# Altium PCB Altium_2023-04-22.pcbdoc (part 1 of 3)
Units mil, origin at the board's own origin, x right, y up, seen from the top; angles counter-clockwise.
Board outline 4864.16 x 2916.69 mil, 2 copper layers (Top Layer, Bottom Layer); 24 components, 36 nets, 126 pads, 11 vias.
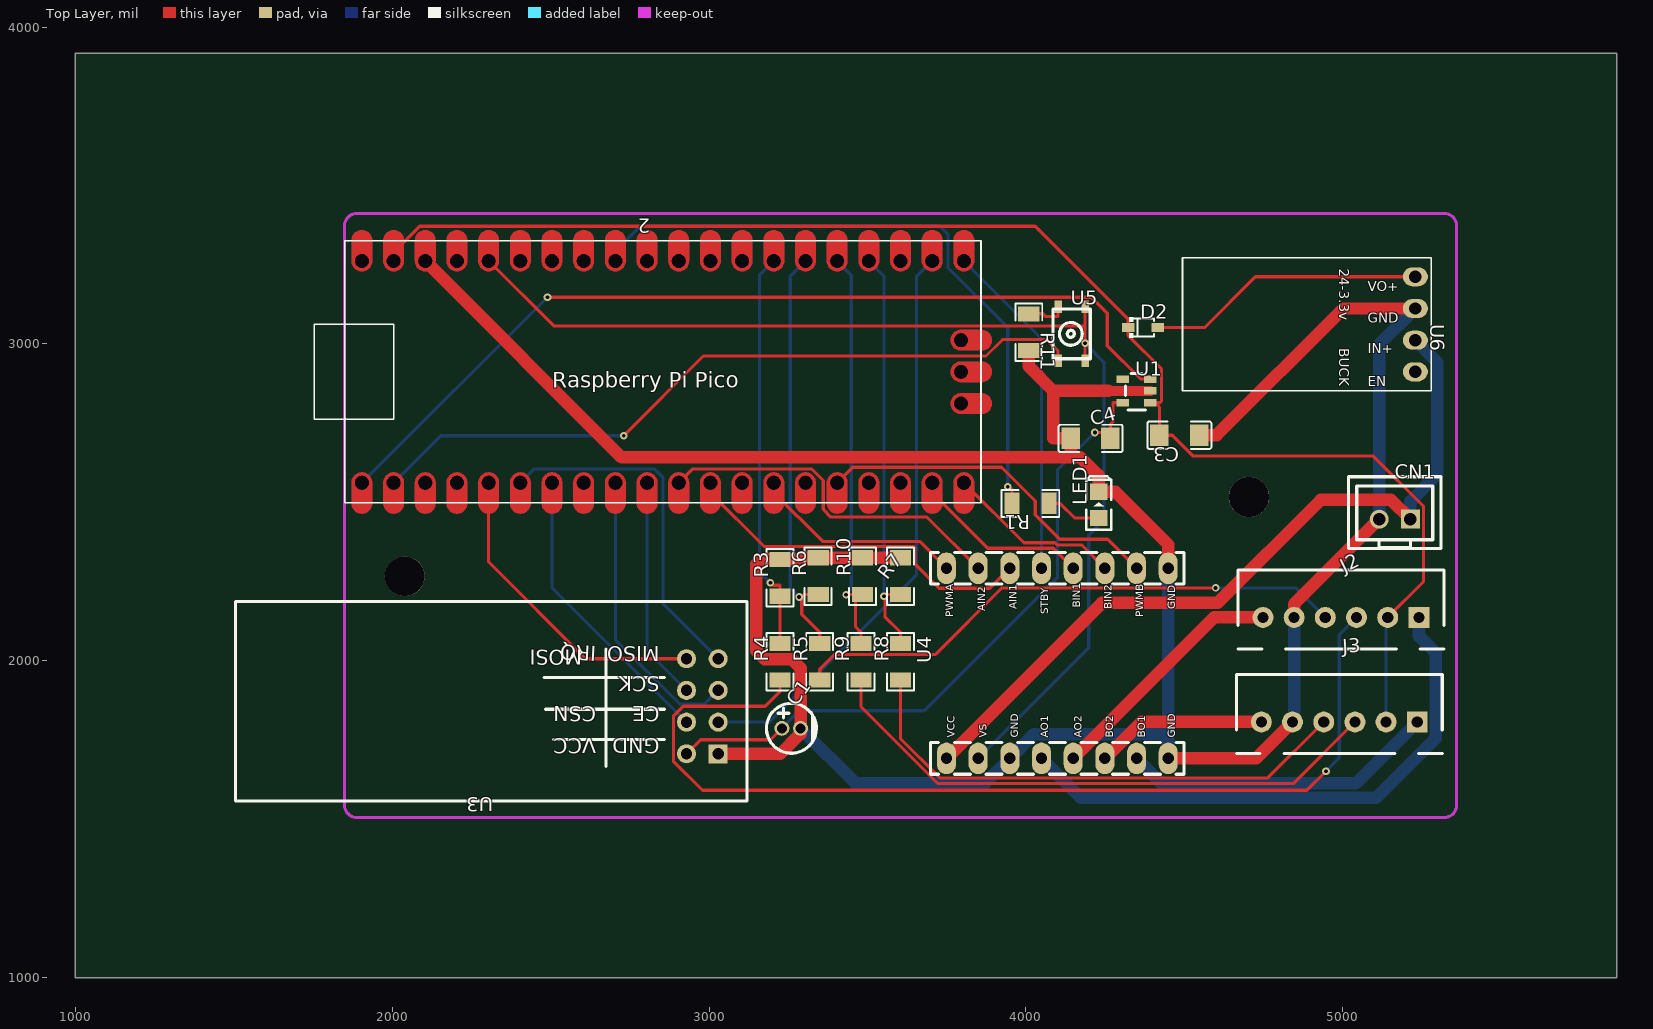
[diagram p0: Top Layer view]
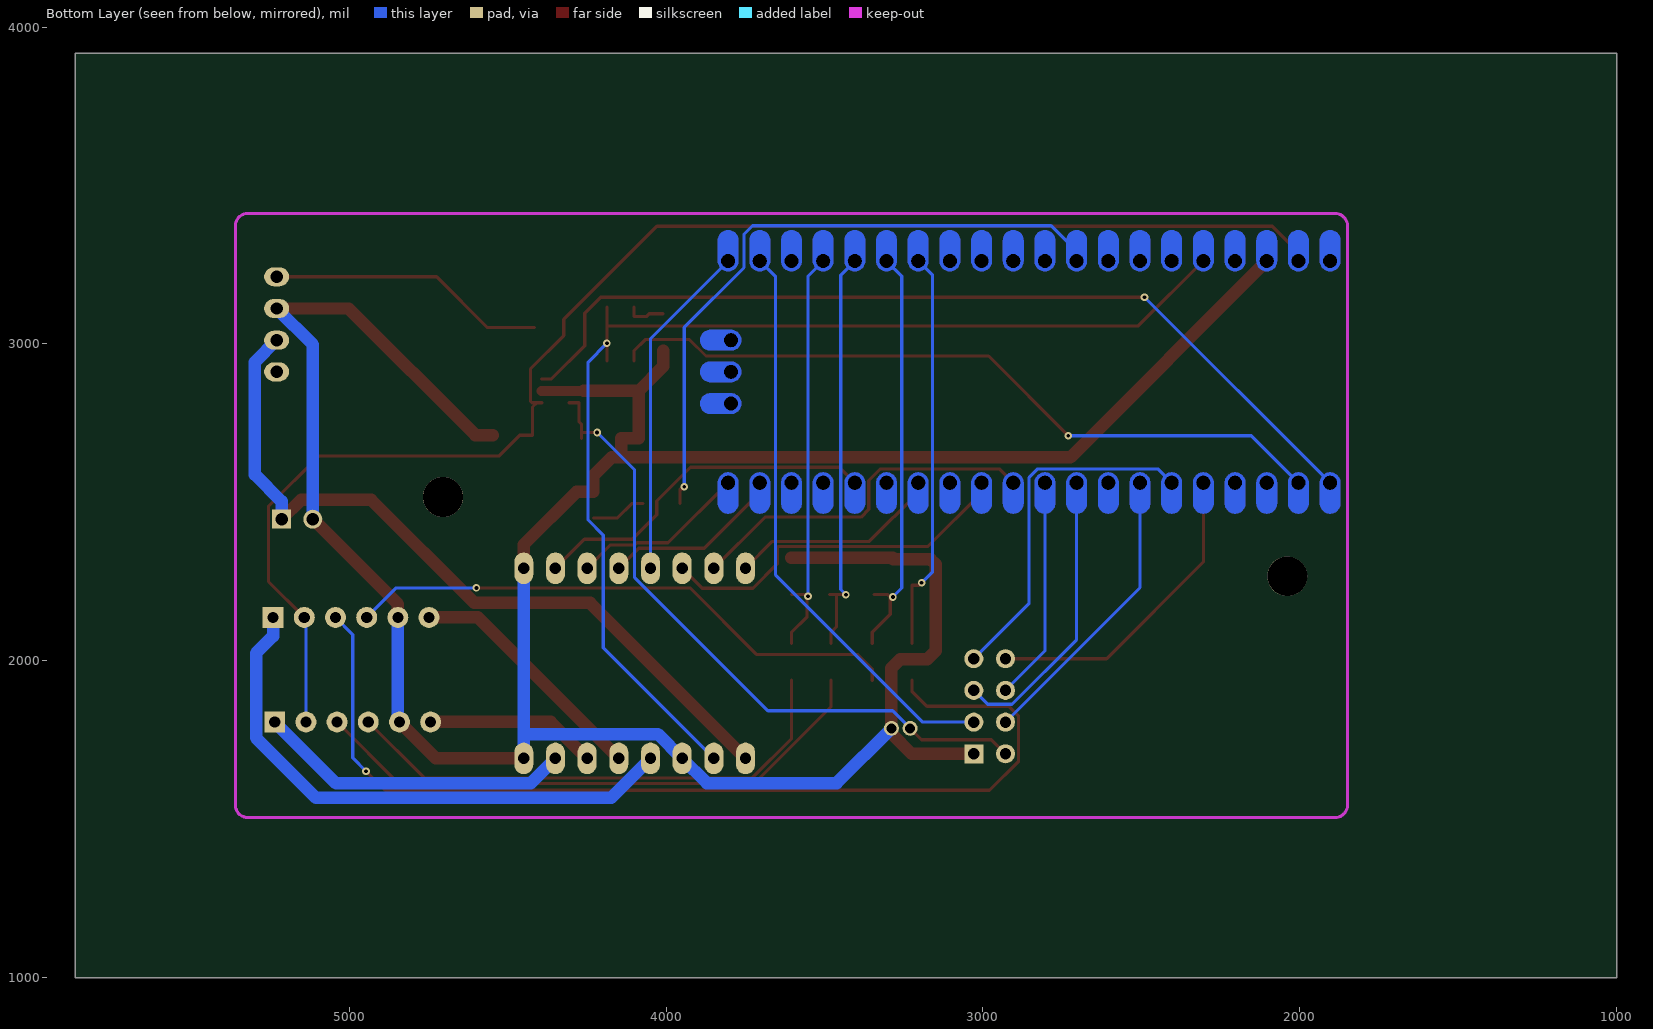
[diagram p1: Bottom Layer view, seen from below]

## Layer stack, top to bottom
Top Layer: signal copper (thickness not stored)
Dielectric: dielectric 12.6, FR-4, Dk 4.8
Bottom Layer: signal copper (thickness not stored)

## Board outline
5864.16,1000 1000,1000 1000,3916.69 5864.16,3916.69

## Components (designator, comment, footprint, x,y, rotation, side; value= is the part's Value field where it differs from the comment)
2 "RASPBERRYPI-PICO" RASPBERRYPIPICO 1904.17,2561.7 r0 top
C1 "10uF" CAP-TH_BD4.0-P1.50-D0.8-FD 3259.17,1786.7 r0 top
C3 "1uF" C1206 4484.17,2711.7 r180 top
C4 "1uF" C1206 4204.17,2701.7 r0 top
CN1 "POWER 12V" CONN-TH_2P-P2.50_JST_B2B-XH-A-M 5164.17,2446.7 r0 top
D2 "CUS10S30,H3F" SOD-323_L1.8-W1.3-LS2.5-RD 4369.17,3051.7 r0 top
J2 "M0" JST-XH-6PIN-2.5 4994.17,2136.7 r0 top
J3 "M1" JST-XH-6PIN-2.5 4989.17,1806.7 r0 top
LED1 "LED-0805_G" LED0805_GREEN 4229.17,2491.7 r90 top
R1 "300" R1206 4014.17,2496.7 r180 top
R3 "10k" R1206 3224.17,2261.7 r90 top
R4 "5k" R1206 3224.17,1996.7 r90 top
R5 "5k" R1206 3349.17,1996.7 r90 top
R6 "10k" R1206 3344.17,2266.7 r90 top
R7 "10k" R1206 3604.17,2266.7 r90 top
R8 "5k" R1206 3604.17,1996.7 r90 top
R9 "5k" R1206 3479.17,1996.7 r90 top
R10 "10k" R1206 3484.17,2266.7 r90 top
R11 "10k" R1206 4009.17,3036.7 r270 top
U1 "TPAP2112K-3.3TRG1" SOT-23-5_L2.9-W1.6-P0.95-LS2.8-BR 4349.17,2851.7 r0 top
U3 "NRF24L01+PA/LNA" NRF24L01+PA+LNA 3119.17,1556.7 r180 top
U4 "TB6612FNG,i7x." TB6612FNG 4099.17,1991.7 r90 top
U5 "Pushbutton 3x4x2.5" "PUSHBUTTON SMD 3X4X2.5" 4144.17,3031.7 r0 top
U6 "HW-613 BUCK" HW-613 5229.17,2911.7 r270 top

## Footprints (in the part's own frame and the unit in brackets; to place one, negate y for a bottom-side part, rotate by r counter-clockwise, add the part's x,y. Pads: shape width x height; smd on the part's side, far side on the other; paste and mask are expansions set on the pad)
C1206 [mm]
  rect 1.485x1.728 smd: 1(-1.593,0) 2(1.593,0)
  silkscreen extent -2.56,-1.09 2.56,1.09
CAP-TH_BD4.0-P1.50-D0.8-FD [mm]
  round 1.2 hole 0.8: 1(-0.75,0) 2(0.75,0)
  silkscreen extent -1.98,-2 2.06,2
CONN-TH_2P-P2.50_JST_B2B-XH-A-M [mil]
  rect 60x60 hole 39.37: 1(49.21,0)
  round 60 hole 39.37: 2(-49.21,0)
  silkscreen extent -146,-93 146,134
HW-613 [mm]
  oval 1.524x2 hole 1: 1(0,0) 2(-2.54,0) 3(-5.08,0) 4(-7.62,0)
  silkscreen extent -9.14,-18.67 1.52,1.27
JST-XH-6PIN-2.5 [mil]
  rect 66x66 hole 35.43: 1(246.06,0)
  round 66 hole 35.43: 2(147.64,0) 3(49.21,0) 4(-49.21,0) 5(-147.64,0) 6(-246.06,0)
  silkscreen extent -325,-100 325,150
LED0805_GREEN [mil]
  rect 51.2x55.1 smd: 1(-41.35,0) 2(41.35,0)
  silkscreen extent -79,-39 91,39
NRF24L01+PA+LNA [mil]
  rect 60x60 hole 36: 1(90.55,-149.61)
  round 60 hole 36: 2(190.55,-149.61) 3(90.55,-249.61) 4(190.55,-249.61) 5(90.55,-349.61) 6(190.55,-349.61) 7(90.55,-449.61) 8(190.55,-449.61)
  silkscreen extent 0,-630 1614,0
"PUSHBUTTON SMD 3X4X2.5" [mm]
  rect 0.6x1 smd: 1(-1.079,2.159) 2(1.08,2.159) 3(-1.079,-2.159) 4(1.08,-2.159)
  silkscreen extent -1.5,-2 1.5,2
R1206 [mil]
  rect 47.54x66.97 smd: 1(-58.22,0) 2(58.22,0)
  silkscreen extent -91,-42 91,42